# Altium PCB PCB1.PcbDoc
Units mm, origin at the board's own origin, x right, y up, seen from the top; angles counter-clockwise.
Board outline 52 x 70 mm, 2 copper layers (Top Layer, Bottom Layer); 10 components, 45 nets, 126 pads, 0 vias.
Unrouted connection lines stored in the file: 66.
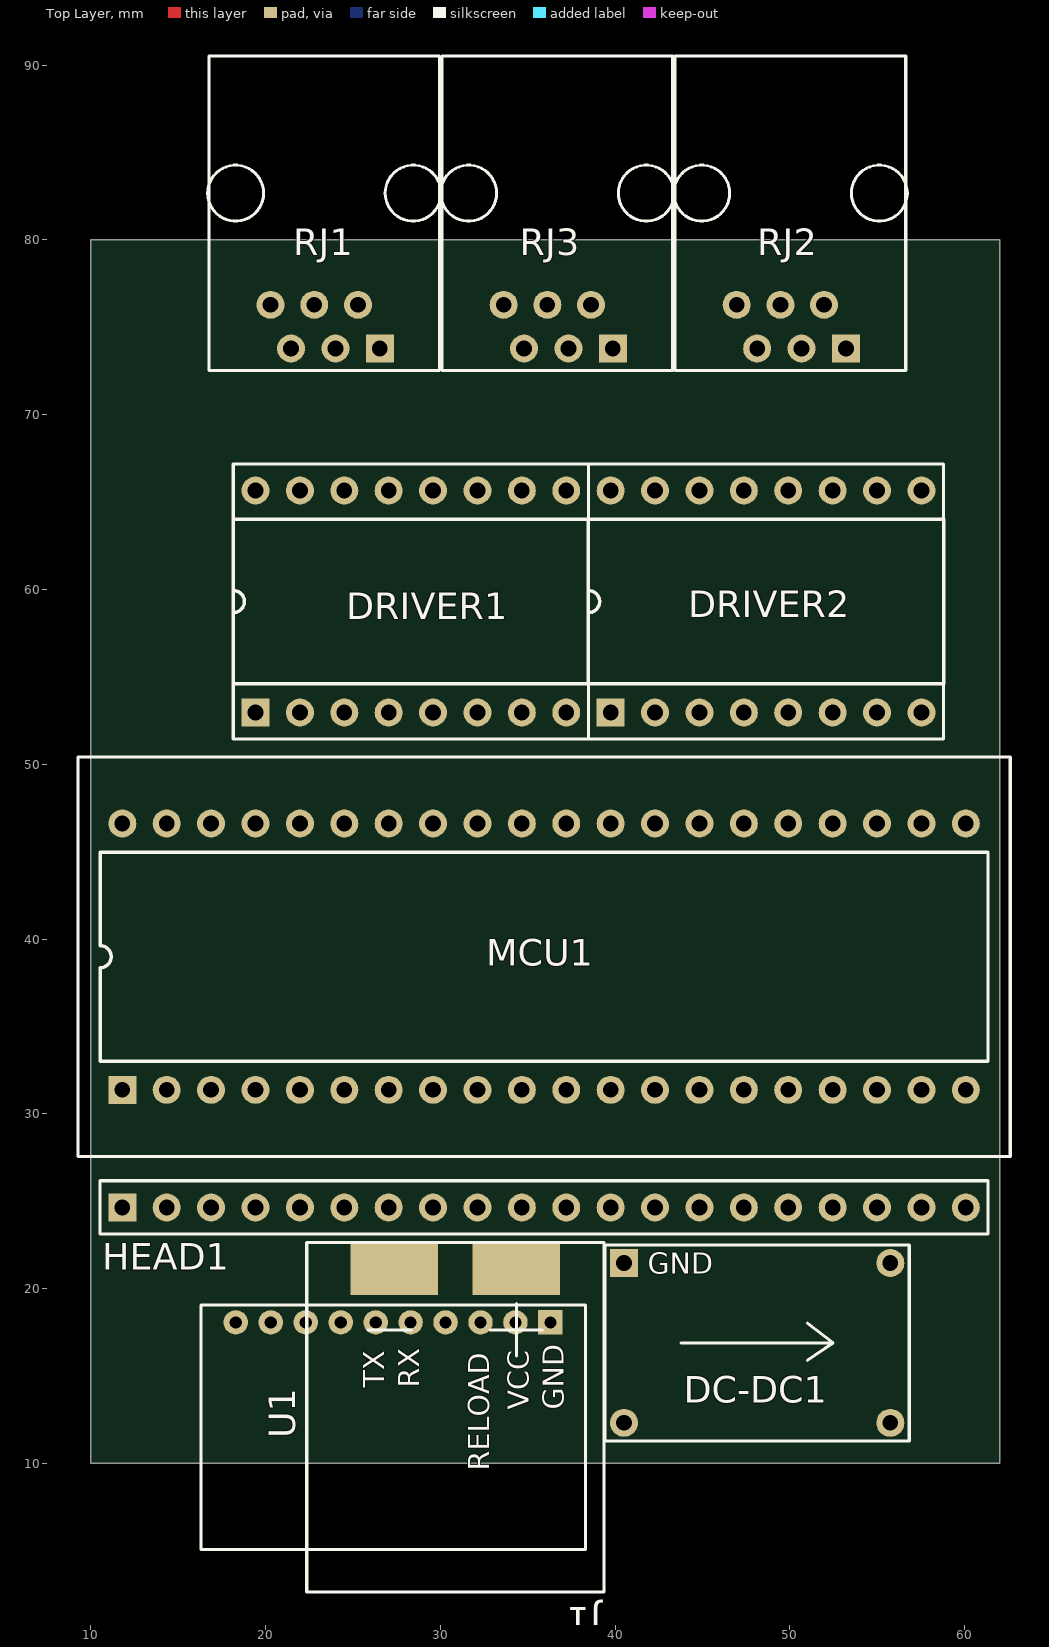
[diagram p0: Top Layer view]
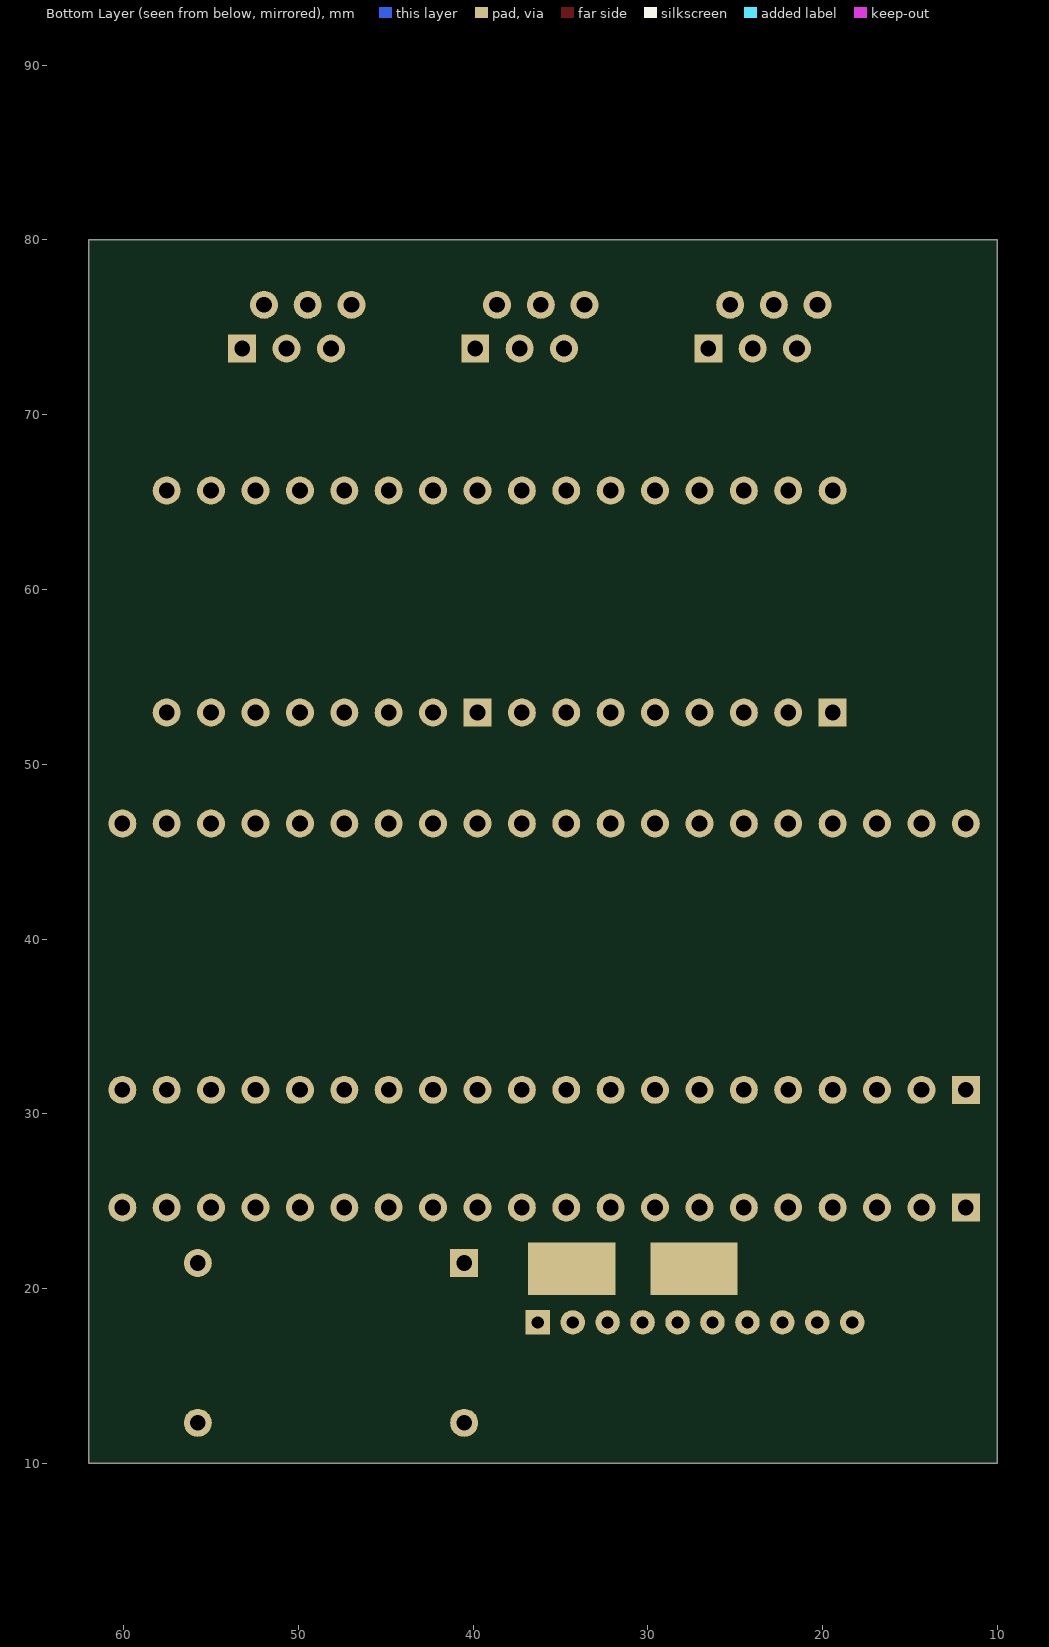
[diagram p1: Bottom Layer view, seen from below]

## Layer stack, top to bottom
Top Solder: solder mask 0.0102, Solder Resist, Dk 3.5
Top Layer: signal copper 0.0356
Dielectric 1: dielectric 0.32, FR-4, Dk 4.8
Bottom Layer: signal copper 0.0356
Bottom Solder: solder mask 0.0102, Solder Resist, Dk 3.5

## Board outline
10,10 62,10 62,80 10,80

## Design rules (kind name [scope] priority, off if disabled: settings)
Clearance [All] p1: gap=0.254
PolygonConnect [All] p1: connectstyle=Relief reliefconductorwidth=0.254 reliefentries=4 polygonreliefangle="90 Angle" airgapwidth=0.254
RoomDefinition 核心板 [InComponentClass('核心板')] p1: confinementstyle=ConfineIn formatcopy=TRUE lockcomponents=FALSE outline 63.119,11.557 186.436,11.557 186.436,67.945 63.119,67.945
RoutingVias [All] p1: holewidth=0.711 width=1.27 viastyle="Through Hole" minholewidth=0.711 minwidth=1.27 maxholewidth=0.711 maxwidth=1.27
SolderMaskExpansion [All] p1: expansion=0.102
Width [All] p1: maxlimit=0.5 minlimit=0.254 preferedwidth=0.254
30 further rules are at their usual default settings.

## Components (designator, comment, footprint, x,y, rotation, side; value= is the part's Value field where it differs from the comment)
DC-DC1 "MINI360稳压模块" MINI360 48.133,16.891 r0 top
DRIVER1 "TMC2100步进电机驱动" DIP16 19.431,52.959 r90 top
DRIVER2 "TMC2100步进电机驱动" DIP16 39.751,52.959 r90 top
HEAD1 "20脚排插" SIP20 11.811,24.638 r90 top
J1 "XT60插座" XT60 30.861,12.636 r180 top
MCU1 "STM32C8T6最小系统" DIP40 11.811,31.369 r90 top
RJ1 "RJ12插座" RJ12 26.543,73.787 r180 top
RJ2 "RJ12插座" RJ12 53.213,73.787 r180 top
RJ3 "RJ12插座" RJ12 39.878,73.787 r180 top
U1 "USR-C215" USR_C215 27.305,12.065 r90 top

## Footprints (in the part's own frame and the unit in brackets; to place one, negate y for a bottom-side part, rotate by r counter-clockwise, add the part's x,y. Pads: shape width x height; smd on the part's side, far side on the other; paste and mask are expansions set on the pad)
DIP16 [mm]
  rect 1.6x1.6 hole 0.9: 1(0,0)
  round 1.6 hole 0.9: 2(0,-2.54) 3(0,-5.08) 4(0,-7.62) 5(0,-10.16) 6(0,-12.7) 7(0,-15.24) 8(0,-17.78) 9(12.7,-17.78) 10(12.7,-15.24) 11(12.7,-12.7) 12(12.7,-10.16) 13(12.7,-7.62) 14(12.7,-5.08) 15(12.7,-2.54) 16(12.7,0)
  silkscreen extent -1.52,-19.05 14.22,1.27
DIP40 [mm]
  rect 1.6x1.6 hole 0.9: 1(0,0)
  round 1.6 hole 0.9: 2(0,-2.54) 3(0,-5.08) 4(0,-7.62) 5(0,-10.16) 6(0,-12.7) 7(0,-15.24) 8(0,-17.78) 9(0,-20.32) 10(0,-22.86) 11(0,-25.4) 12(0,-27.94) 13(0,-30.48) 14(0,-33.02) 15(0,-35.56) 16(0,-38.1) 17(0,-40.64) 18(0,-43.18) 19(0,-45.72) 20(0,-48.26) 21(15.24,-48.26) 22(15.24,-45.72) 23(15.24,-43.18) 24(15.24,-40.64) 25(15.24,-38.1) 26(15.24,-35.56) 27(15.24,-33.02) 28(15.24,-30.48) 29(15.24,-27.94) 30(15.24,-25.4) 31(15.24,-22.86) 32(15.24,-20.32) 33(15.24,-17.78) 34(15.24,-15.24) 35(15.24,-12.7) 36(15.24,-10.16) 37(15.24,-7.62) 38(15.24,-5.08) 39(15.24,-2.54) 40(15.24,0)
  silkscreen extent -3.81,-50.8 19.05,2.54
MINI360 [mm]
  rect 1.6x1.6 hole 0.9: 1(-7.62,4.572)
  round 1.6 hole 0.9: 2(-7.62,-4.572) 3(7.62,-4.572) 4(7.62,4.572)
  silkscreen extent -8.7,-5.6 8.7,5.6
RJ12 [mm]
  rect 1.6x1.6 hole 0.9: 1(0,0)
  round 1.6 hole 0.9: 2(1.25,-2.5) 3(2.54,0) 4(3.75,-2.5) 5(5.08,0) 6(6.25,-2.5)
  silkscreen extent -3.51,-16.74 9.85,1.26
SIP20 [mm]
  rect 1.6x1.6 hole 0.9: 1(0,0)
  round 1.6 hole 0.9: 2(0,-2.54) 3(0,-5.08) 4(0,-7.62) 5(0,-10.16) 6(0,-12.7) 7(0,-15.24) 8(0,-17.78) 9(0,-20.32) 10(0,-22.86) 11(0,-25.4) 12(0,-27.94) 13(0,-30.48) 14(0,-33.02) 15(0,-35.56) 16(0,-38.1) 17(0,-40.64) 18(0,-43.18) 19(0,-45.72) 20(0,-48.26)
  silkscreen extent -1.52,-49.53 1.52,1.27
USR_C215 [mm]
  rect 1.4x1.4 hole 0.7: 1(6,-9)
  round 1.4 hole 0.7: 2(6,-7) 3(6,-5) 4(6,-3) 5(6,-1) 6(6,1) 7(6,3) 8(6,5) 9(6,7) 10(6,9)
  silkscreen extent -7,-11 7,11
XT60 [mm]
  rect 5x3 all layers, no hole: 1(-3.5,-8.5) 2(3.5,-8.5)
  silkscreen extent -8.5,-10 8.5,10

## Nets (pads, with @x,y where several pads share a name; then routed paths per layer and width w, separated by ;. In a path a pad name is that pad's centre, name@x,y a point inside that pad or via, vN(x,y) a via of type N, cw(c..) or ccw(c..) an arc to the next point about the centre after c; other vN are vias at no path point)
GND: DC-DC1.4 DRIVER1.9 DRIVER2.9 HEAD1.19 HEAD1.20 MCU1.19 MCU1.20 MCU1.39 RJ3.2 U1.1
NetDC-DC1_1: DC-DC1.1 DRIVER1.15 DRIVER2.15 J1.1
NetDC-DC1_2: DC-DC1.2 DRIVER1.16 DRIVER2.16 J1.2
NetDC-DC1_3: DC-DC1.3 DRIVER1.10 DRIVER2.10 MCU1.38
NetDRIVER1_1: DRIVER1.1 MCU1.37
NetDRIVER1_2: DRIVER1.2 MCU1.36
NetDRIVER1_3: DRIVER1.3 MCU1.35
NetDRIVER1_4: DRIVER1.4 MCU1.34
NetDRIVER1_5: DRIVER1.5 MCU1.33
NetDRIVER1_6: DRIVER1.6 MCU1.32
NetDRIVER1_7: DRIVER1.7 MCU1.31
NetDRIVER1_8: DRIVER1.8 MCU1.30
NetDRIVER1_11: DRIVER1.11 RJ1.4
NetDRIVER1_12: DRIVER1.12 RJ1.3
NetDRIVER1_13: DRIVER1.13 RJ1.5
NetDRIVER1_14: DRIVER1.14 RJ1.2
NetDRIVER2_1: DRIVER2.1 MCU1.29
NetDRIVER2_2: DRIVER2.2 MCU1.28
NetDRIVER2_3: DRIVER2.3 MCU1.27
NetDRIVER2_4: DRIVER2.4 MCU1.26
NetDRIVER2_5: DRIVER2.5 MCU1.25
NetDRIVER2_6: DRIVER2.6 MCU1.24
NetDRIVER2_7: DRIVER2.7 MCU1.23
NetDRIVER2_8: DRIVER2.8 MCU1.22
NetDRIVER2_11: DRIVER2.11 RJ2.4
NetDRIVER2_12: DRIVER2.12 RJ2.3
NetDRIVER2_13: DRIVER2.13 RJ2.5
NetDRIVER2_14: DRIVER2.14 RJ2.2
NetHEAD1_2: HEAD1.2 MCU1.2
NetHEAD1_3: HEAD1.3 MCU1.3
NetHEAD1_4: HEAD1.4 MCU1.4
NetHEAD1_5: HEAD1.5 MCU1.5 RJ3.5
NetHEAD1_6: HEAD1.6 MCU1.6 RJ3.4
NetHEAD1_7: HEAD1.7 MCU1.7
NetHEAD1_8: HEAD1.8 MCU1.8 RJ3.6
NetHEAD1_9: HEAD1.9 MCU1.9
NetHEAD1_10: HEAD1.10 MCU1.10
NetHEAD1_11: HEAD1.11 MCU1.11
NetHEAD1_12: HEAD1.12 MCU1.12 RJ3.3
NetHEAD1_13: HEAD1.13 MCU1.13
NetHEAD1_14: HEAD1.14 MCU1.14
NetHEAD1_17: HEAD1.17 MCU1.17
NetMCU1_15: MCU1.15 U1.5
NetMCU1_16: MCU1.16 U1.6
VCC: HEAD1.1 HEAD1.18 MCU1.1 MCU1.18 U1.2
pads on no net: HEAD1.15 HEAD1.16 MCU1.21 MCU1.40 RJ1.1 RJ1.6 RJ2.1 RJ2.6 RJ3.1 U1.3 U1.4 U1.7 U1.8 U1.9 U1.10

## Silkscreen, mask and mechanical layers (free items; w line width, h text height)
Mechanical 1:
  circle w0.013: c59,78 r1
  circle w0.013: c13,12 r1
  circle w0.013: c59,12 r1
  circle w0.013: c13,78 r1
  lines w0.013: 10,10 10,80 62,80 62,10 10,10

## Text inside footprints (layer, text, board x,y; h text height)
DC-DC1: Top Overlay "GND" at 41.883,20.841 h1.2
U1: Top Overlay "GND" at 37.055,13.065 h1.2 r90; Top Overlay "VCC" at 35.055,13.065 h1.2 r90; Top Overlay "RELOAD" at 32.805,9.565 h1.2 r90; Top Overlay "TX" at 26.805,14.315 h1.2 r90; Top Overlay "RX" at 28.805,14.315 h1.2 r90